# EAGLE board BuckBoard (EAGLE 5.10)
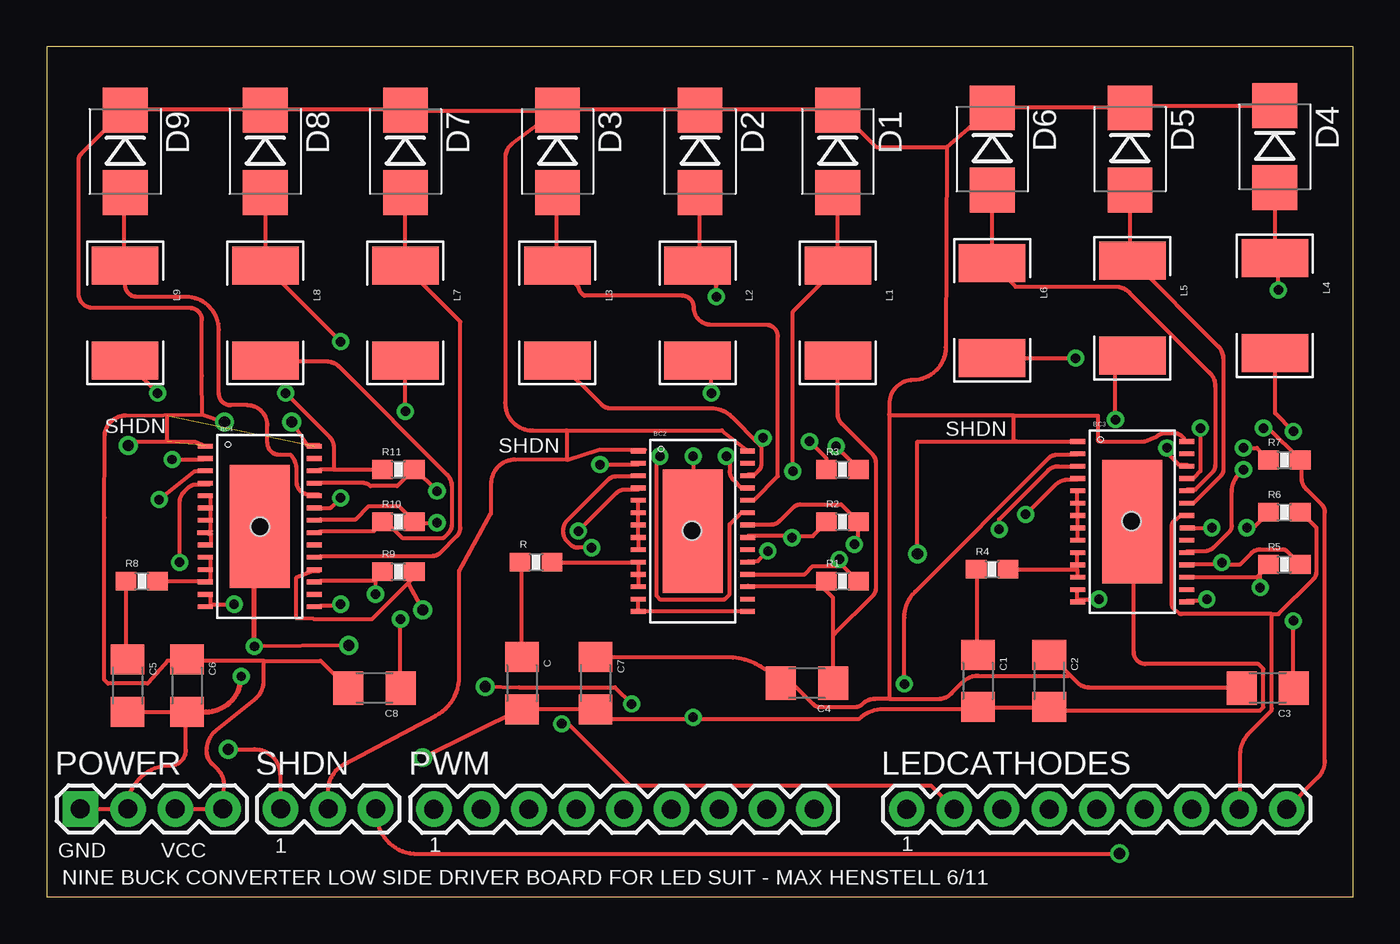
[diagram p0: board, top side]
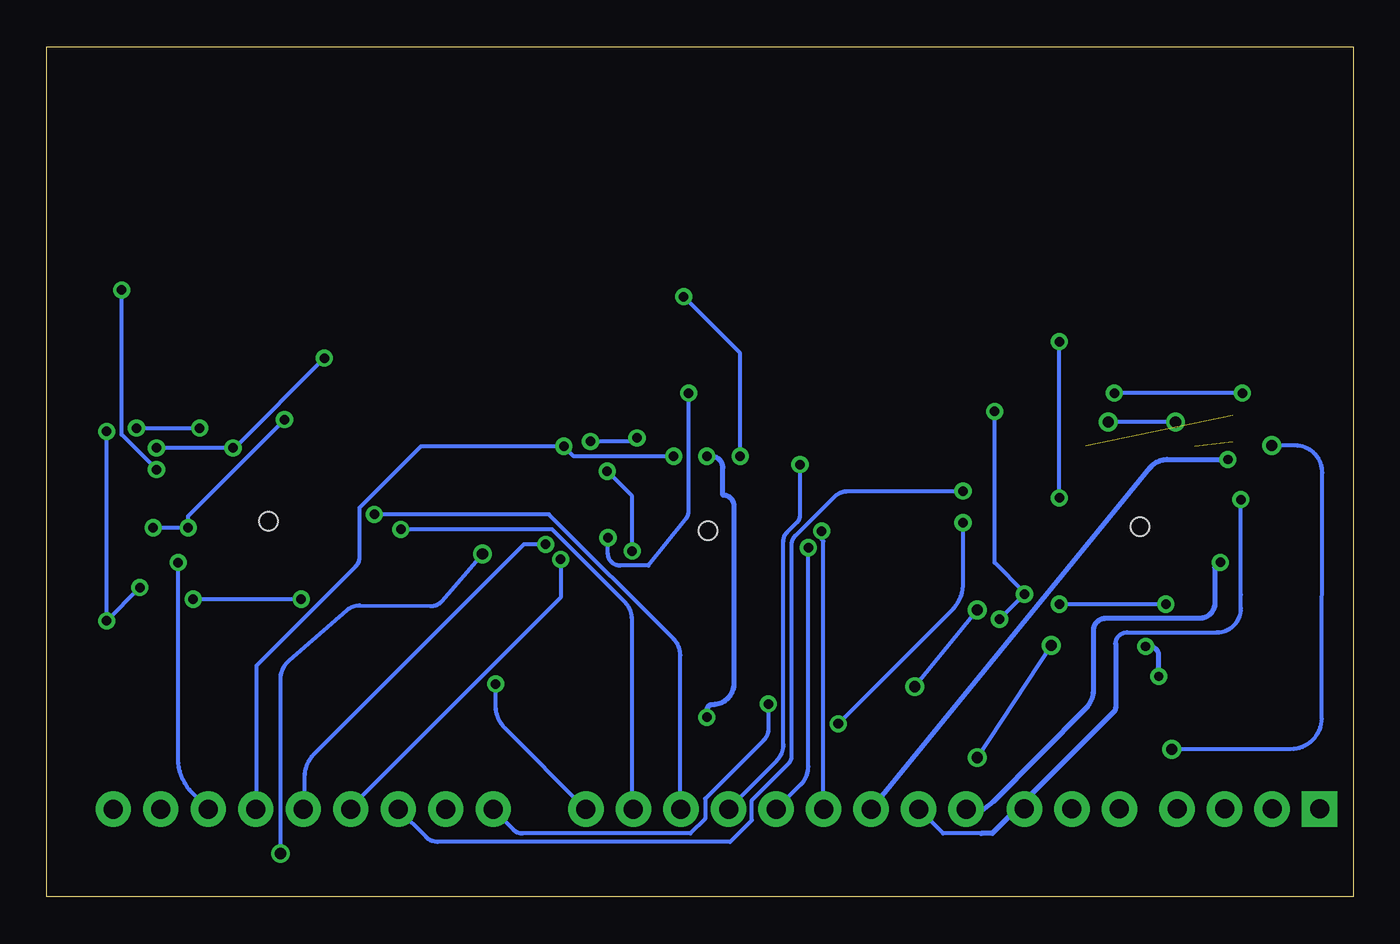
[diagram p1: board, bottom side, seen from below]

Size 69.85 x 45.48 mm. Coordinates in mm from the lower left corner, seen from the top.
Outline: 0,0 69.85,0 69.85,45.48 0,45.48 0,0
Copper layers (1*16): Top 0.035mm / dielectric 1.5mm / Bottom 0.035mm
Design rules "default *": minimum track width 8mil, minimum drill 20mil, track to track 8mil, track to pad 8mil, pad to pad 8mil, via to via 8mil, smd to smd 8mil, copper to edge 10mil, drill to drill 8mil, minimum pad ring 10mil, minimum via ring 8mil, stop-mask expansion 4mil, vias tented up to drill 0mil, thermal gap 10mil
Net classes: 0 default: width 0.203 mm, drill 0.508 mm, clearance 0.203 mm
Holes 1 mm at 11.4,19.8 34.5,19.6 58,20.1

## Footprints (pad centres in the part's own frame; a part is rotated, then mirrored left to right if it is on the bottom)
TSSOP28-GROUNDPAD = smd 0.8 x 0.25: 1 -2.921,4.298; 2 -2.921,3.637; 3 -2.921,2.977; 4 -2.921,2.317; 5 -2.921,1.656; 6 -2.921,0.996; 7 -2.921,0.335; 8 -2.927,-0.325; 9 -2.921,-0.985; 10 -2.921,-1.646; 11 -2.921,-2.306; 12 -2.921,-2.967; 13 -2.921,-3.627; 14 -2.921,-4.287; 15 2.921,-4.287; 16 2.921,-3.627; 17 2.921,-2.967; 18 2.921,-2.306; 19 2.921,-1.646; 20 2.921,-0.985; 21 2.927,-0.325; 22 2.921,0.335; 23 2.921,0.996; 24 2.921,1.656; 25 2.921,2.317; 26 2.921,2.977; 27 2.921,3.637; 28 2.921,4.298 | smd 3.2 x 6.6: 29 0,0.005
1206 = smd 1.6 x 1.8: 1 -1.4,0; 2 1.4,0
SMB-DIODE = smd 2.4 x 2.4: A 2.2,0; C -2.2,0
INDUCTOR-1206 = smd 2.032 x 3.556: P$1 -2.54,0; P$2 2.54,0
1X09 = drill 1.016 pad 1.88 round: 1 0,0; 2 2.54,0; 3 5.08,0; 4 7.62,0; 5 10.16,0; 6 12.7,0; 7 15.24,0; 8 17.78,0; 9 20.32,0
1X04 = drill 1.016 pad 1.88 square: 1 0,0 | drill 1.016 pad 1.88 round: 2 2.54,0; 3 5.08,0; 4 7.62,0
0603-RES = smd 1.1 x 1: 1 -0.85,0; 2 0.85,0
1X03 = drill 1.016 pad 1.88 round: 1 0,0; 2 2.54,0; 3 5.08,0

## Placement (x,y rotation side)
BC1  LT3496TSSOP28  [TSSOP28-GROUNDPAD]  11.38,19.81 0 top
BC2  LT3496TSSOP28  [TSSOP28-GROUNDPAD]  34.54,19.56 0 top
BC3  LT3496TSSOP28  [TSSOP28-GROUNDPAD]  58.04,20.07 0 top
C  470pF  [1206]  25.4,11.43 270 top
C1  470pF  [1206]  49.78,11.56 270 top
C2  1uF  [1206]  53.59,11.56 270 top
C3  1uF  [1206]  65.28,11.18 180 top
C4  1uF  [1206]  40.64,11.43 180 top
C5  470pF  [1206]  4.32,11.3 270 top
C6  1uF  [1206]  7.49,11.3 270 top
C7  1uF  [1206]  29.34,11.43 270 top
C8  1uF  [1206]  17.53,11.18 180 top
D1  1A 60V  [SMB-DIODE]  42.29,39.88 270 top
D2  1A 60V  [SMB-DIODE]  34.92,39.88 270 top
D3  1A 60V  [SMB-DIODE]  27.3,39.88 270 top
D4  1A 60V  [SMB-DIODE]  65.66,40.13 270 top
D5  1A 60V  [SMB-DIODE]  57.91,40.01 270 top
D6  1A 60V  [SMB-DIODE]  50.55,40.01 270 top
D7  1A 60V  [SMB-DIODE]  19.18,39.88 270 top
D8  1A 60V  [SMB-DIODE]  11.68,39.88 270 top
D9  1A 60V  [SMB-DIODE]  4.19,39.88 270 top
L1  10uH  [INDUCTOR-1206]  42.29,31.24 270 top
L2  10uH  [INDUCTOR-1206]  34.8,31.24 270 top
L3  10uH  [INDUCTOR-1206]  27.3,31.24 270 top
L4  10uH  [INDUCTOR-1206]  65.66,31.62 270 top
L5  10uH  [INDUCTOR-1206]  58.04,31.5 270 top
L6  10uH  [INDUCTOR-1206]  50.55,31.37 270 top
L7  10uH  [INDUCTOR-1206]  19.18,31.24 270 top
L8  10uH  [INDUCTOR-1206]  11.68,31.24 270 top
L9  10uH  [INDUCTOR-1206]  4.19,31.24 270 top
LEDCATHODES  [1X09]  45.97,4.7 0 top
POWER  [1X04]  1.8,4.7 0 top
PWM  [1X09]  20.7,4.7 0 top
R  22k  [0603-RES]  26.16,17.91 0 top
R1  330mO  [0603-RES]  42.55,16.89 0 top
R2  330mO  [0603-RES]  42.55,20.07 0 top
R3  330mO  [0603-RES]  42.55,22.86 0 top
R4  22k  [0603-RES]  50.55,17.53 0 top
R5  330mO  [0603-RES]  66.17,17.78 0 top
R6  330mO  [0603-RES]  66.17,20.57 0 top
R7  330mO  [0603-RES]  66.17,23.37 0 top
R8  22k  [0603-RES]  5.08,16.89 0 top
R9  330mO  [0603-RES]  18.8,17.4 0 top
R10  330mO  [0603-RES]  18.8,20.07 0 top
R11  330mO  [0603-RES]  18.8,22.86 0 top
SHDN  [1X03]  12.5,4.7 0 top

## Library data of the parts
BC1-BC3 C C1-C8 D1-D9 L1-L9 LEDCATHODES POWER PWM R R1-R11 SHDN = SparkFun

## Nets
GND: BC1.29 BC2.29 BC3.29 C1.2 C2.2 C5.2 C6.2 C7.2 C.2 POWER.1 POWER.2
LED1C: BC1.18 LEDCATHODES.1 R9.2
LED2C: BC1.22 LEDCATHODES.2 R10.2
LED3C: BC1.25 LEDCATHODES.3 R11.2
LED4C: BC2.18 LEDCATHODES.4 R1.2
LED5C: BC2.22 LEDCATHODES.5 R2.2
LED6C: BC2.25 LEDCATHODES.6 R3.2
LED7C: BC3.18 LEDCATHODES.7 R5.2
LED8C: BC3.22 LEDCATHODES.8 R6.2
LED9C: BC3.25 LEDCATHODES.9 R7.2
N$1: BC2.13 BC2.14 BC2.15
N$3: BC3.10 BC3.11 BC3.12 R4.2
N$4: BC2.10 BC2.11 BC2.12 R.2
N$5: BC2.19 D1.A L1.P$1
N$6: C.1 R.1
N$7: BC2.17 C4.1 L1.P$2 R1.1
N$8: BC2.23 D2.A L2.P$1
N$9: BC2.5 BC2.6 BC2.7 BC2.8 BC2.9
N$10: BC2.24 D3.A L3.P$1
N$11: C1.1 R4.1
N$12: BC2.21 L2.P$2 R2.1
N$13: BC2.26 L3.P$2 R3.1
N$14: BC3.17 C3.1 L4.P$2 R5.1
N$15: BC3.19 D4.A L4.P$1
N$16: BC3.5 BC3.6 BC3.7 BC3.8 BC3.9
N$17: BC3.23 D5.A L5.P$1
N$18: BC3.24 D6.A L6.P$1
N$19: BC3.21 L5.P$2 R6.1
N$20: BC3.26 L6.P$2 R7.1
N$21: BC3.13 BC3.14 BC3.15
N$22: BC1.10 BC1.11 BC1.12 R8.2
N$23: C5.1 R8.1
N$24: BC1.17 C8.1 L7.P$2 R9.1
N$25: BC1.19 D7.A L7.P$1
N$26: BC1.5 BC1.6 BC1.7 BC1.8 BC1.9
N$27: BC1.23 D8.A L8.P$1
N$28: BC1.24 D9.A L9.P$1
N$29: BC1.21 L8.P$2 R10.1
N$30: BC1.26 L9.P$2 R11.1
N$31: BC1.13 BC1.14 BC1.15
PWM1: BC1.4 PWM.1
PWM2: BC1.3 PWM.2
PWM3: BC1.2 PWM.3
PWM4: BC2.4 PWM.4
PWM5: BC2.3 PWM.5
PWM6: BC2.2 PWM.6
PWM7: BC3.4 PWM.7
PWM8: BC3.3 PWM.8
PWM9: BC3.2 PWM.9
SHDN1: BC1.1 BC1.28 SHDN.1
SHDN2: BC2.1 BC2.28 C2.1 C3.2 C4.2 C6.1 C7.1 C8.2 D1.C D2.C D3.C D4.C D5.C D6.C D7.C D8.C D9.C POWER.3 POWER.4 SHDN.2
SHDN3: BC3.1 BC3.28 SHDN.3

## Tracks (layer width: path | path; a pad name or v marks a point on that pad's centre or on a via)
GND  (via drill 0.5, 0.51, 0.6)
  Top 0.203: C5.2 4.33,9.88 7.44,9.88 C6.2 7.44,9.79 7.44,7.86 arc-90 6.61,7.04 arc90 4.34,4.79 POWER.2 POWER.1 | 25.4,10.06 29.31,10.06 C7.2 29.4,9.97 29.84,9.53 34.56,9.53 | C.2 25.4,10.06 | 34.56,9.53 43.45,9.53 arc-45 44.73,10.06 49.76,10.06 C1.2 49.85,10.15 53.58,10.15 C2.2 53.67,10.15 53.85,9.97 64.87,9.97 65.05,10.15 65.05,12.19 64.78,12.46 58.75,12.46 arc-90 58.12,13.09 58.12,20.02 BC3.29 | v34.56,23.57 34.56,19.57 BC2.29 | 34.56,9.53 v34.56,9.61 | 25.4,10.06 v20.1,7.45 | v16.15,13.45 v11.1,13.4
  Top 0.254: C6.2 8.5,9.9 arc90 v10.4,11.8 | v11.1,13.4 11.1,19.53 arc-90 BC1.29
  Bottom 0.203: v20.1,7.45 v16.15,13.45
  Bottom 0.254: v34.56,23.57 34.32,23.57 arc90 33.7,22.95 33.7,21.5 arc90 33.1,20.9 33.1,11.44 arc90 34.24,10.3 arc-90 34.56,9.98 v34.56,9.61 | v10.4,11.8 10.4,13 arc-90 v11.1,13.4
LED1C  (via drill 0.51, 0.6)
  Top 0.203: 19.31,16.77 19.62,17.08 19.62,17.35 R9.2 | 19.31,16.77 17.4,14.86 14.29,14.86 13.34,14.9 13.34,17.08 14.2,17.44 14.55,17.44 BC1.18 | v31.27,10.32 30.38,11.21 25.25,11.21 v23.45,11.25 | 19.31,16.77 19.36,16.73 v20.1,15.35
  Bottom 0.203: v31.27,10.32 31.27,9 arc45 31.52,8.38 34.65,5.26 34.65,4.19 35.45,3.39 44.41,3.39 arc45 44.89,3.59 45.94,4.64 LEDCATHODES.1 | v20.1,15.35 v23.45,11.25
LED2C  (via drill 0.51)
  Top 0.203: BC1.22 14.64,20.19 16.51,20.19 17.22,20.9 18.82,20.9 19.62,20.1 R10.2 19.71,20.02 v20.87,20.02 | v27.53,9.26 27.89,9.26 31.18,5.97 47.27,5.97 48.51,4.72 LEDCATHODES.2
  Bottom 0.203: v20.87,20.02 20.87,16.82 arc45 21.5,15.3 v27.53,9.26
LED3C  (via drill 0.51)
  Top 0.203: BC1.25 14.64,22.15 16.88,22.15 arc-45 17.31,21.97 18.73,21.97 19.62,22.86 R11.2 19.71,22.86 v20.87,21.7
  Bottom 0.203: v20.87,21.7 27.02,21.7 arc-45 27.74,21.41 29.84,19.31 arc-45 30.02,18.86 30.02,7.54 arc45 30.19,7.13 32.16,5.17 32.16,4.1 33.31,2.95 48.95,2.95 arc45 49.57,3.2 51,4.64 LEDCATHODES.3
LED4C  (via drill 0.51)
  Top 0.203: 42.38,17.7 42.56,17.7 43.36,16.9 R1.2 | 42.38,17.7 40.96,17.7 40.51,17.26 37.49,17.26 BC2.18 | 42.38,17.7 v42.38,18.06
  Bottom 0.203: v42.38,18.06 42.38,16.02 53.67,4.72 LEDCATHODES.4
LED5C  (via drill 0.51)
  Top 0.203: BC2.22 37.49,19.93 38.74,19.93 arc45 39.19,20.11 39.92,20.84 arc-45 40.28,20.99 42.47,20.99 43.36,20.1 R2.2 43.36,20.02 43.36,19.04 v43.18,18.86
  Bottom 0.203: v43.18,18.86 44.34,18.86 55.59,7.6 arc-45 56.07,6.45 56.07,4.72 LEDCATHODES.5
LED6C  (via drill 0.51)
  Top 0.203: v36.34,23.57 36.51,23.39 36.51,22.77 arc45 36.7,22.32 37.13,21.88 37.4,21.88 BC2.25 | v42.2,24.11 43.45,22.86 R3.2
  Bottom 0.203: v36.34,23.57 41.67,23.57 v42.2,24.11 49.85,24.11 53.14,20.82 53.14,18.16 arc45 53.33,17.68 58.65,12.37 58.65,4.72 LEDCATHODES.6
LED7C  (via drill 0.51)
  Top 0.203: 62.83,17.79 63.8,17.79 64.42,18.41 arc-45 64.87,18.59 66.08,18.59 arc-45 66.3,18.5 67,17.79 R5.2 | 62.83,17.79 60.96,17.79 BC3.18 | v62.83,17.88 62.83,17.79
  Bottom 0.203: v62.83,17.88 62.83,7.4 arc-45 62.07,5.57 61.23,4.72 LEDCATHODES.7
LED8C
  Top 0.203: 65.49,15.13 65.85,15.13 67.71,16.98 arc45 67.89,17.43 67.89,19.75 67.09,20.55 R6.2 | 65.49,15.13 60.66,15.13 arc-38 60.56,15.16 60.28,15.38 arc-52 60.15,15.64 60.15,19.85 arc-52 60.28,20.11 60.6,20.37 60.96,20.37 BC3.22 | LEDCATHODES.8 63.8,4.72 63.8,7.6 arc-45 64.29,8.76 65.42,9.9 arc45 65.49,10.07 65.49,15.13
LED9C  (via drill 0.51)
  Top 0.203: v61.67,25.08 61.67,22.77 61.32,22.42 60.96,22.42 BC3.25 | v65.05,25.08 65.32,25.08 67,23.39 R7.2 67.09,23.3 67.09,22.4 arc45 67.33,21.82 68.17,20.98 arc-45 68.34,20.57 68.34,7.3 arc-45 67.96,6.39 66.29,4.72 LEDCATHODES.9
  Bottom 0.203: v65.05,25.08 v61.67,25.08
N$1
  Top 0.203: BC2.13 BC2.14 31.71,15.3 37.4,15.3 BC2.15
N$3
  Top 0.203: 55.09,17.53 55.09,17.7 BC3.11 55.09,17.79 55.09,18.41 BC3.10 | 55.09,17.53 55.09,17.17 BC3.12 | R4.2 55.09,17.53
N$4
  Top 0.203: BC2.12 BC2.11 BC2.10 31.53,17.88 27.09,17.88 R.2
N$5  (via drill 0.51)
  Top 0.203: v38.56,18.5 38.02,17.97 37.49,17.97 BC2.19 | v39.89,22.77 39.89,31.3 42.29,33.71 L1.P$1 D1.A
  Bottom 0.203: v38.56,18.5 38.56,21.44 v39.89,22.77
N$6
  Top 0.203: R.1 25.4,17.88 C.1
N$7
  Top 0.203: BC2.17 37.49,16.64 41.49,16.64 41.67,16.82 R1.1 41.49,16.55 42.02,16.02 42.02,14.06 | 42.02,14.06 42.02,11.48 C4.1 | L1.P$2 42.29,25.82 arc45 42.5,25.32 44.15,23.67 arc-45 44.34,23.22 44.34,16.51 arc-45 44.18,16.12 42.11,14.06 42.02,14.06
N$8  (via drill 0.51)
  Top 0.203: v32.78,23.57 32.6,23.39 32.6,16.1 32.78,15.93 36.25,15.93 36.51,16.19 36.51,19.93 37.13,20.55 37.4,20.55 BC2.23 | v35.8,32.11 35.8,32.73 34.82,33.71 L2.P$1 34.91,33.71 34.91,37.62 D2.A
  Bottom 0.203: v32.78,23.57 32.78,29.08 v35.8,32.11
N$9
  Top 0.203: BC2.5 BC2.6 BC2.7 31.62,19.3 BC2.8 31.62,19.21 BC2.9
N$10
  Top 0.203: BC2.24 37.49,21.26 37.85,21.26 39.09,22.5 39.09,29.98 arc90 38.47,30.6 35.53,30.6 arc-90 34.6,31.53 arc90 33.97,32.16 28.75,32.16 arc-45 28.43,32.63 27.36,33.71 L3.P$1 27.27,33.8 27.27,37.62 D3.A
N$11
  Top 0.203: R4.1 49.76,17.53 49.76,12.99 C1.1
N$12  (via drill 0.51)
  Top 0.203: 39.85,19.3 40.96,19.3 41.67,20.02 R2.1 | 39.85,19.3 37.49,19.3 BC2.21 | v35.53,26.95 35.53,27.93 34.82,28.64 L2.P$2 | v39.85,19.21 39.85,19.3
  Bottom 0.203: v35.53,26.95 35.53,20.63 arc45 35.72,20.18 37.68,17.73 39.21,17.73 arc90 39.85,18.36 v39.85,19.21
N$13  (via drill 0.51)
  Top 0.203: 38.02,24.28 38.2,24.11 38.2,23.14 arc-45 38.06,22.81 37.85,22.59 37.49,22.59 BC2.26 | 38.02,24.28 36.62,25.69 arc45 35.51,26.15 30.11,26.15 arc-45 29.66,26.34 27.36,28.64 L3.P$2 | v40.78,24.37 41.67,23.48 41.67,22.86 R3.1 | 38.02,24.28 v38.29,24.55
  Bottom 0.203: v40.78,24.37 38.47,24.37 v38.29,24.55
N$14  (via drill 0.51)
  Top 0.203: 64.83,17.21 65.32,17.7 R5.1 | 64.83,17.21 64.69,17.08 60.96,17.08 BC3.17 | v66.65,14.77 66.65,11.21 C3.1 | v64.87,16.55 64.87,17.17 64.83,17.21 | v66.65,24.91 65.67,25.88 65.67,29.08 L4.P$2
  Bottom 0.203: v64.87,16.55 v66.65,14.77 v66.65,24.91
N$15  (via drill 0.51)
  Top 0.203: v63.98,22.86 63.76,22.64 arc45 63.36,21.68 63.36,19.86 arc-45 63.22,19.52 62.43,18.73 arc-45 61.89,18.5 60.96,18.5 BC3.19 | v65.85,32.46 65.85,33.97 L4.P$1 65.67,34.24 65.67,37.88 D4.A
  Bottom 0.203: v63.98,22.86 65.85,24.73 v65.85,32.46
N$16
  Top 0.203: BC3.9 55.09,19.13 55.09,19.66 BC3.8 55.09,19.84 55.09,20.37 BC3.7 55.09,20.46 55.09,20.99 BC3.6 55.09,21.08 55.09,21.7 BC3.5
N$17
  Top 0.203: BC3.23 60.96,21.08 61.32,21.08 62.79,22.56 arc45 62.92,22.86 62.92,28.78 arc45 62.64,29.45 58.12,33.97 L5.P$1 57.94,34.06 57.94,37.8 D5.A
N$18
  Top 0.203: BC3.24 60.96,21.79 61.4,21.79 62.32,22.7 arc45 62.47,23.08 62.47,27.31 arc45 62.16,28.06 57.89,32.33 arc45 57.15,32.64 51.8,32.64 50.56,33.88 L6.P$1 50.56,33.97 D6.A
N$19  (via drill 0.51)
  Top 0.203: v62.29,19.75 61.05,19.75 BC3.21 | v64.16,19.75 64.52,19.75 65.32,20.55 R6.1 | v57.14,25.53 57.14,28.02 58.03,28.91 L5.P$2
  Bottom 0.203: v64.16,19.75 v62.29,19.75 62.29,20.37 v57.14,25.53
N$20  (via drill 0.51)
  Top 0.203: v59.89,24.02 59.89,23.75 60.52,23.13 60.96,23.13 BC3.26 | v63.98,24.02 64.69,24.02 65.32,23.39 R7.1 | v55,28.82 50.56,28.82 L6.P$2
  Bottom 0.203: v63.98,24.02 v59.89,24.02 59.8,24.02 v55,28.82
N$21  (via drill 0.51)
  Top 0.203: 55.09,15.93 55.09,16.37 BC3.13 | 55.09,15.93 55.09,15.84 BC3.14 | v62.03,15.93 61.94,15.84 60.96,15.84 BC3.15 | 55.09,15.93 v56.25,15.93
  Bottom 0.203: v56.25,15.93 v62.03,15.93
N$22
  Top 0.203: BC1.10 8.78,18.15 8.78,17.53 BC1.11 8.78,17.44 8.78,16.9 BC1.12 8.69,16.9 5.93,16.9 R8.2
N$23
  Top 0.203: R8.1 4.24,16.82 4.24,12.72 C5.1
N$24  (via drill 0.51)
  Top 0.203: BC1.17 14.64,16.9 17.49,16.9 17.93,17.35 R9.1 17.58,16.9 v17.58,16.19 | v18.91,14.86 18.91,11.21 C8.1 | v19.18,25.97 L7.P$2
  Bottom 0.203: v18.91,14.86 v17.58,16.19 17.58,16.28 19.18,17.88 v19.18,25.97
N$25
  Top 0.203: BC1.19 14.64,18.24 20.6,18.24 arc45 21.05,18.42 21.93,19.3 arc45 22.11,19.75 22.11,30.77 19.18,33.71 L7.P$1 D7.A
N$26
  Top 0.203: BC1.9 8.78,18.86 8.78,19.39 BC1.8 8.78,19.57 8.78,20.1 BC1.7 8.78,20.19 8.78,20.73 BC1.6 8.78,20.9 8.78,21.44 BC1.5
N$27  (via drill 0.51)
  Top 0.203: v15.71,21.35 15.18,20.82 14.64,20.82 BC1.23 | v15.71,29.7 11.71,33.71 L8.P$1 11.71,33.8 11.71,37.62 D8.A
  Bottom 0.203: v15.71,21.35 v15.71,29.7
N$28
  Top 0.203: BC1.24 14.55,21.53 14.2,21.53 13.97,21.54 arc-88 13.37,22.17 13.37,22.85 arc44 13.04,23.65 12.44,23.65 arc-90 11.8,24.28 11.8,25.22 arc90 10.72,26.3 9.84,26.3 arc-90 9.2,26.93 9.2,30.33 arc90 7.43,32.1 4.83,32.1 arc-90 4.19,32.73 L9.P$1 4.15,33.8 4.15,37.62 D9.A
N$29
  Top 0.203: BC1.21 14.64,19.57 17.49,19.57 17.93,20.02 R10.1 18.02,20.02 18.2,20.02 19,19.21 21.22,19.21 21.48,19.47 arc45 21.67,19.92 21.67,21.97 arc45 21.41,22.58 15.63,28.36 arc45 14.96,28.64 11.71,28.64 L8.P$2
N$30  (via drill 0.51)
  Top 0.203: 15.35,22.86 14.64,22.86 BC1.26 | 15.35,22.86 R11.1 | v5.93,26.95 4.24,28.64 L9.P$2 | v12.78,26.95 15.11,24.62 arc-45 15.35,24.02 15.35,22.86
  Bottom 0.203: v5.93,26.95 v12.78,26.95
N$31  (via drill 0.51)
  Top 0.203: 8.78,15.66 8.78,16.1 BC1.13 | 8.78,15.66 8.78,15.57 BC1.14 | v15.71,15.66 15.62,15.57 14.64,15.57 BC1.15 | 8.78,15.66 v10.02,15.66
  Bottom 0.203: v10.02,15.66 v15.71,15.66
PWM1  (via drill 0.51)
  Top 0.203: v7.11,17.89 7.11,21.13 arc-45 7.32,21.65 7.56,21.89 arc-45 7.97,22.06 8.69,22.06 BC1.4
  Bottom 0.203: 19.8,4.72 20.69,4.72 PWM.1
  Bottom 0.254: v7.11,17.89 arc-90 7.4,17.6 7.4,15.72 arc90 8.22,14.9 13.18,14.9 arc-90 13.9,14.28 13.9,11.04 arc45 14.28,10.12 19.25,5.1 19.74,4.7 arc45 19.8,4.72
PWM2  (via drill 0.51)
  Top 0.203: v6.01,21.26 7.92,22.77 8.69,22.77 BC1.3
  Bottom 0.203: v6.01,21.26 6.01,16.17 6.01,15.44 arc90 7.28,14.15 12.1,14.15 arc-90 12.7,13.55 | 19.89,3.39 21.93,3.39 PWM.2
  Bottom 0.254: 12.7,13.55 12.7,10.13 arc45 12.79,9.91 19.3,3.4 19.87,3.4 arc-45 19.89,3.39
PWM3  (via drill 0.5)
  Top 0.203: v6.7,23.4 8.41,23.4 BC1.2
  Bottom 0.254: PWM.3 10.85,22.97 arc51 9.95,23.4 v6.7,23.4
PWM4  (via drill 0.51)
  Top 0.203: v28.42,19.57 30.46,21.61 arc-45 30.91,21.79 31.62,21.79 BC2.4
  Bottom 0.203: v28.42,19.57 28.42,19.13 28.33,19.04 28.33,4.72 PWM.4
PWM5  (via drill 0.51)
  Top 0.203: v29.13,18.68 28.42,18.68 arc-45 27.97,18.87 27.81,19.03 arc-45 27.62,19.48 27.62,19.66 arc-45 27.81,20.11 30.02,22.32 arc-45 30.46,22.5 31.62,22.5 BC2.3
  Bottom 0.203: v29.13,18.68 29.13,6.98 arc45 29.54,6.01 30.82,4.72 PWM.5
PWM6  (via drill 0.51)
  Top 0.203: v29.58,23.13 31.62,23.13 BC2.2
  Bottom 0.203: v29.58,23.13 29.58,20.39 arc45 29.72,20.05 30.28,19.49 arc-45 30.47,19.04 30.47,8.14 arc45 30.81,7.32 33.4,4.72 PWM.6
PWM7  (via drill 0.51)
  Top 0.203: v52.34,20.46 53.91,22.03 arc-45 54.63,22.33 55.09,22.33 BC3.4
  Bottom 0.203: v52.34,20.46 43,20.46 36.33,13.79 arc45 35.98,12.94 35.98,4.72 PWM.7
PWM8  (via drill 0.51)
  Top 0.203: v50.91,19.66 50.91,20.19 53.53,22.81 arc-45 54.08,23.04 55.09,23.04 BC3.3
  Bottom 0.203: v50.91,19.66 42.82,19.66 38.95,15.78 arc45 38.56,14.84 38.56,4.72 PWM.8
PWM9  (via drill 0.51)
  Top 0.203: v45.85,11.39 45.85,14.94 arc-45 46.42,16.32 53.58,23.48 arc-45 54.01,23.66 55.09,23.66 BC3.2
  Bottom 0.203: PWM.9 45.36,9.04 arc45 45.85,10.22 v45.85,11.39
SHDN1  (via drill 0.6)  (3 unrouted)
  Top 0.203: v9.7,7.9 11.12,7.9 arc-89 12.47,6.57 SHDN.1 | v4.35,24.15 4.55,24.35 6.45,24.35 | 6.45,24.35 7.9,24.35 BC1.1 | 6.45,24.35 6.45,25.75
  Bottom 0.203: v9.7,7.9 3.36,7.9 arc-90 1.7,9.56 1.66,22.69 arc-90 3.1,24.15 v4.35,24.15
SHDN2  (via drill 0.6)
  Top 0.203: 11.6,12.64 7.53,12.64 C6.1 7.44,12.64 6.46,12.64 5.4,11.42 3.26,11.42 3.09,11.6 3.09,20.28 3.1,24.61 arc-90 4.22,25.76 8.3,25.79 | 11.6,12.64 14.64,12.64 16.07,11.21 C8.2 | 14.55,24.19 13.9,24.19 v13.1,25.4 | C7.1 29.4,12.81 36.4,12.81 arc-45 38.87,11.79 39.18,11.48 C4.2 39.27,11.39 39.89,11.39 40.98,10.3 arc45 41.35,10.15 43.21,10.15 arc45 43.61,10.31 arc-45 44.28,10.59 45.05,10.59 | 54.69,11.88 53.67,12.9 C2.1 | 54.69,11.88 55.12,11.45 arc45 55.7,11.21 63.8,11.21 C3.2 | 45.05,10.59 47.66,10.59 arc45 48.36,10.88 48.98,11.5 arc-45 49.79,11.84 54.65,11.84 54.69,11.88 | D4.C 65.58,42.33 57.85,42.33 D5.C 57.85,42.24 50.56,42.24 D6.C 50.47,42.15 48.12,40.11 | 31.98,23.93 31.62,23.93 BC2.1 31.53,23.93 29.55,23.93 27.8,23.38 | BC2.28 37.4,23.93 36.1,24.95 27.8,24.95 | D3.C 27.36,42.15 34.91,42.15 D2.C 35,42.15 42.29,42.15 D1.C 42.38,42.06 44.34,40.11 48.12,40.11 | D3.C 27.27,42.06 24.88,40.28 arc53 24.52,39.58 24.52,27.87 24.51,26.42 arc91 25.97,24.95 27.8,24.95 | 45.05,10.59 45.05,17.43 45.05,26.39 arc-90 46.31,27.65 arc89 48.06,29.39 48.12,40.11 | D3.C 27.18,42.06 19.27,42.06 D7.C 19.18,42.15 11.71,42.15 D8.C 11.62,42.15 4.24,42.15 D9.C 4.15,42.06 1.85,39.76 arc45 1.7,39.4 1.7,32.28 arc90 2.48,31.5 7.67,31.5 arc-90 8.3,30.86 8.3,27.87 8.3,25.79 | SHDN.2 15.04,5.69 arc-62 15.9,7.1 20.79,9.69 arc62 22.05,11.77 22.05,17.45 23.75,20.5 23.75,22.09 arc-90 25.06,23.39 27.8,23.38 | 27.8,24.95 27.8,23.38 | POWER.3 POWER.4 9.48,6 arc48 9.18,6.77 8.84,7.11 arc-45 8.55,7.81 arc-51 9.09,8.93 11.13,10.57 arc51 11.6,11.55 11.6,12.64 | 8.3,25.79 v9.5,25.4
  Bottom 0.203: v9.5,25.4 v13.1,25.4
SHDN3  (via drill 0.6)
  Top 0.203: 55.18,24.37 BC3.1 51.85,24.36 | BC3.28 60.7,24.63 arc45 60.25,24.82 59.8,24.82 arc45 59.35,24.63 58.69,24.37 56.3,24.37 56.3,24.4 56.2,24.4 56.2,25.75 51.7,25.75 | 51.85,24.36 51.7,24.36 51.7,25.75 | 51.7,25.75 45.05,25.75 45.05,25.85 | SHDN.3 17.6,4.7 17.6,4.52 arc90 19.82,2.3 55.72,2.3 v57.35,2.32 | v46.55,18.35 46.55,24.35 51.85,24.36
  Bottom 0.203: v57.35,2.32 57.35,11.64 arc49 56.89,12.65 53.79,15.35 arc42 53.12,15.6 49.34,15.55 arc-50 48.7,15.84 v46.55,18.35

## Text on the board
tNames: SHDN | SHDN | SHDN | GND | VCC | 1 | 1 | 1 | NINE BUCK CONVERTER LOW SIDE DRIVER BOARD FOR LED SUIT - MAX HENSTELL 6/11